# Altium PCB PCB2.PcbDoc (part 2 of 3)
Units mil, origin at the board's own origin, x right, y up, seen from the top; angles counter-clockwise.
Board outline 7000 x 3315 mil, 4 copper layers (Top Signal, GND, PWR, Bottom Signal), stack 23.756 mil thick; 198 components, 124 nets, 690 pads, 273 vias.
Unrouted connection lines stored in the file: 2.
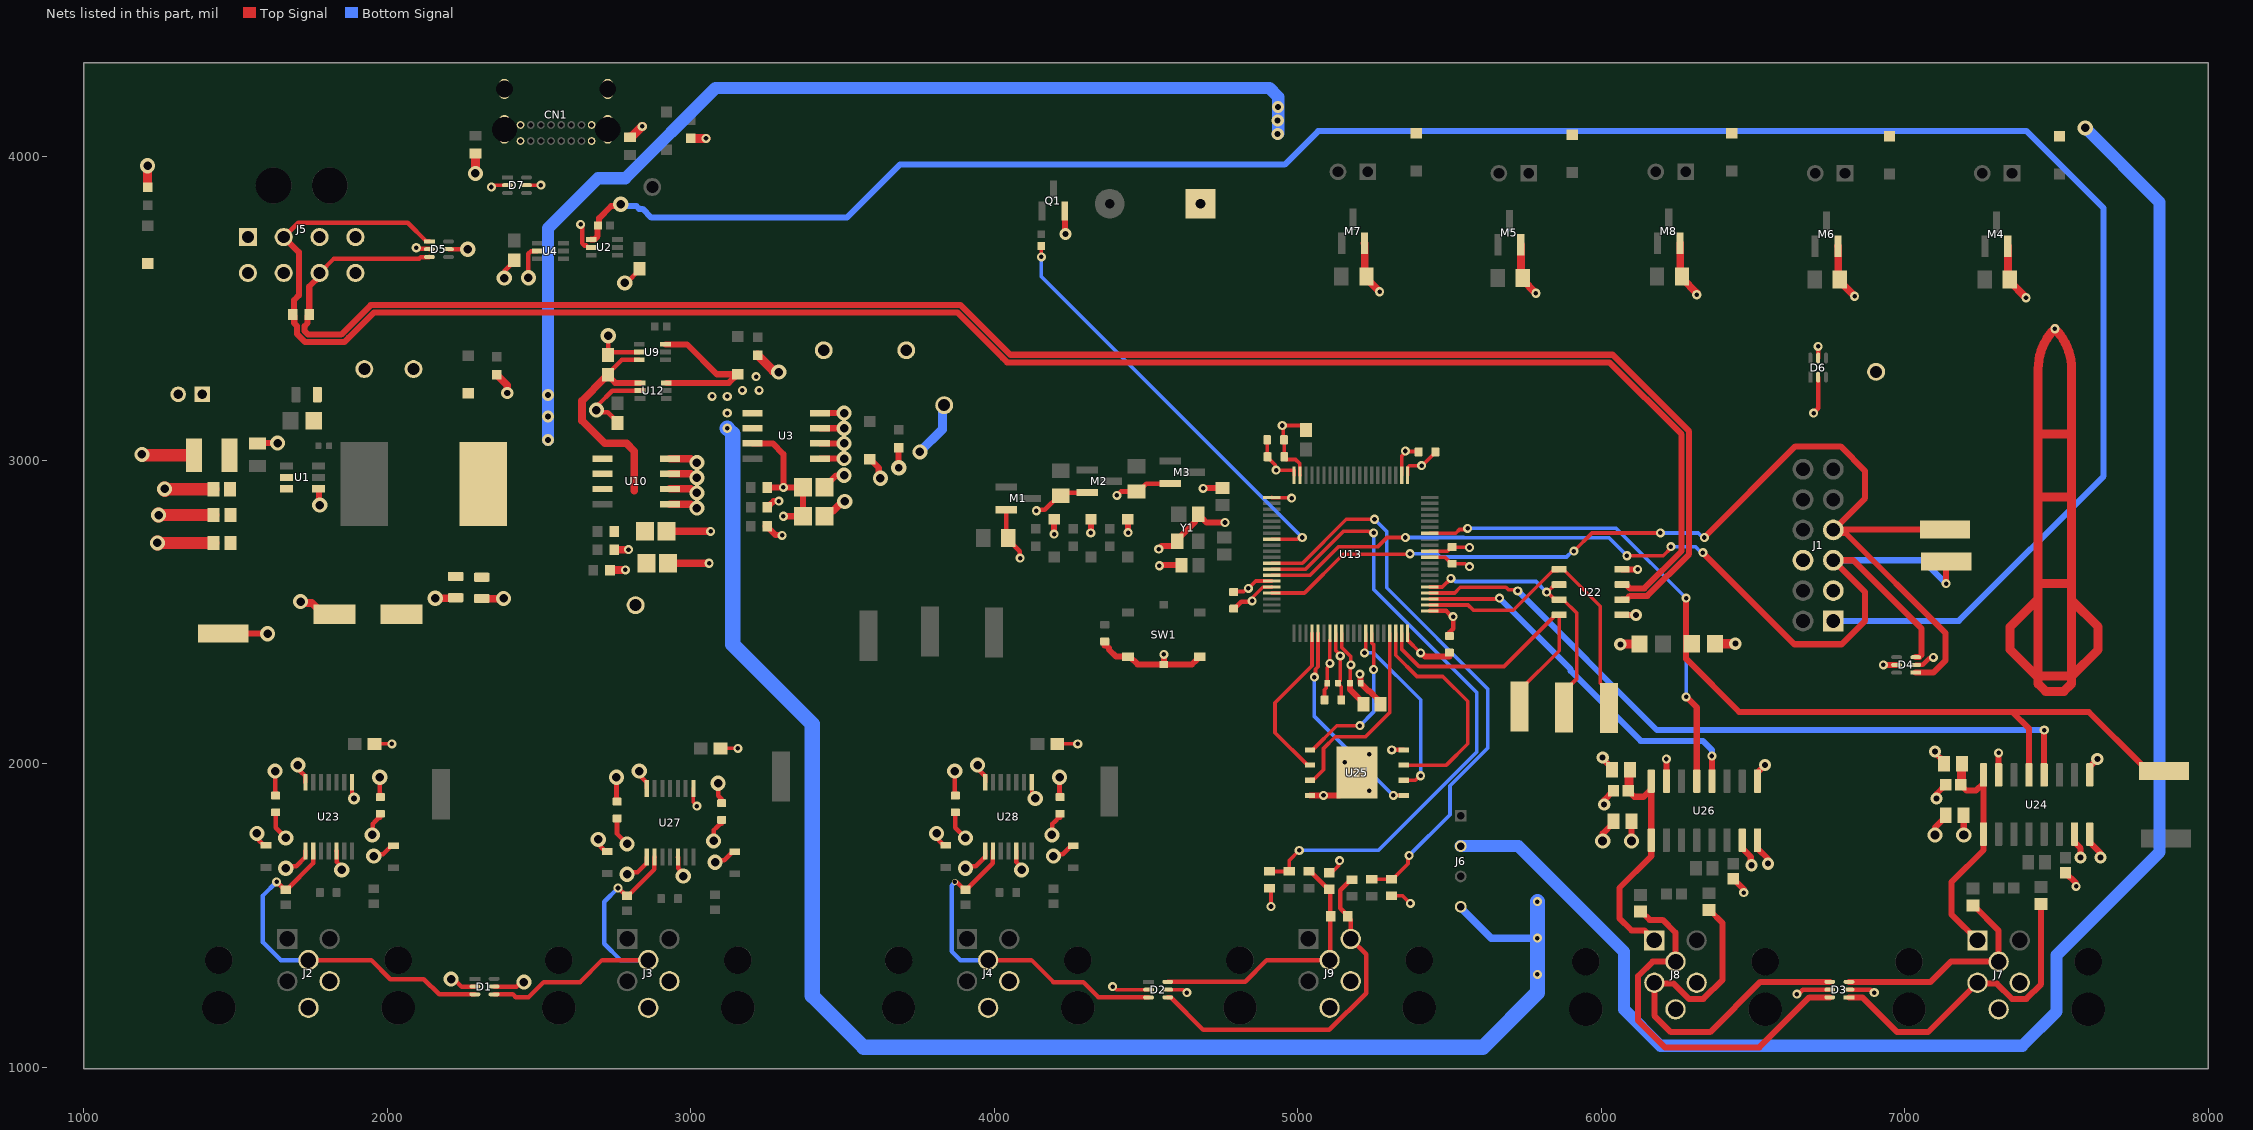
[diagram p4: the nets of this part, all layers, seen from the top]

## Part data (continued)
C28: library part CMP-001-00185-1, "C0603C103K5RACTU - Multilayer Ceramic Capacitors Mlcc - Smd/Smt 50V 0.01Uf X7R 0603 10%", Capacitor Type=Ceramic, Case/Package=0603, Max Operating Temperature=125°C, Min Operating Temperature=-55°C, Tolerance=10%, Voltage Rating=50V, Mounting Technology="Surface Mount", Pins=2, RoHS Compliant=Yes
C32 C34 C49 C51 C54 C56: library part CMP-001-00094-1, "CAP CER 10000PF 50V X7R 0603", Case/Package="0603 (1608 Metric)", Manufacturer="TDK Corporation", Operating Temperature="-55°C ~ 125°C", Temperature Coefficient=X7R, Tolerance=10%, Voltage - Rated=50V, ComponentLink1Description=Datasheet, ComponentLink1URL=https://product.tdk.com/info/en/catalog/spec/mlccspec_automotive_general_en.pdf, Design Item ID=CGA3E2X7R1H103K080AA, Manufacturer Part Number=CGA3E2X7R1H103K080AA, Mounting Type="Surface Mount, MLCC", Size / Dimension="0.063\" L x 0.031\" W (1.60mm x 0.80mm)", Source=PlumBay_SchLib.SchLib, Thickness (Max)="0.035\" (0.90mm)"
C35 C37 C41 C43: library part CMP-001-00007-7, "Chip Capacitor, 1 uF, +/- 10%, 50 V, 0805 (2012 Metric)", Capacitor Type=Ceramic, Case/Package=0805, Max Operating Temperature=125°C, Min Operating Temperature=-55°C, Tolerance=10%, Voltage Rating=50V, Mounting Technology=SM, Pins=2, RoHS Compliant=True
C36 C38 C39 C42 C44 C45: library part CMP-001-00017-7, "Chip Capacitor, 100 nF, +/- 10%, 50 V, 0603 (1608 Metric)", Capacitor Type=Ceramic, Case/Package=0603, Max Operating Temperature=125°C, Min Operating Temperature=-55°C, Tolerance=10%, Voltage Rating=50V, Mounting Technology=SM, Pins=2, RoHS Compliant=True
C40 C46: library part CMP-001-00107-2, "KGM15ACG1H331FT - Cap Ceramic 330pF 50V C0G 1% Pad SMD 0603 125C T/R", Capacitor Type=Ceramic, Case/Package=0603, Max Operating Temperature=125°C, Min Operating Temperature=-55°C, Mounting Technology="Surface Mount", Pins=2, RoHS Compliant=Yes
CN1: library part CMP-002-00138-4, "USB Connector, 16 Contact(s), Female, Right Angle, Solder Terminal, Locking, Receptacle", Max Operating Temperature=85°C, Min Operating Temperature=-40°C, Voltage Rating=20V, Gender=Receptacle, Pins=16
CS1 CS2 CS3 D_Rx D_Tx DE GND MISO MOSI Rx SCK SCL SDA Tx: library part CMP-002-00130-3, "PC TEST POINT 1206 footprint RCWCTE"
D1 D2 D3 D4 D5 D6 D7: library part CMP-004-00069-1, "ESD Suppressors / TVS Diodes 4 Ch TVS Diode Array 3.3V 6.0A 200mW", Case/Package=SOT-363, Max Operating Temperature=150°C, Max Surge Current=5A, Min Operating Temperature=-55°C, Mounting Technology="Surface Mount", Pins=6
DS1 DS2 DS3 DS4 DS5 DS6 DS7: library part CMP-007-00024-2, "LED Uni-Color Red, 62.5 mW, 25 mA, -30 to 85 degC, 2-Pin SMD, RoHS, Tape and Reel", Case/Package=0603, Colour=Red, Forward Current=20mA, Forward Voltage=2V, Manufacturer=Lite-On, Max Operating Temperature=85°C, Min Operating Temperature=-55°C, Package Description="2-Pin Surface Mount Device, Body 1.6 x 0.8 mm", Package Quantity=3000, Package Reference=C191KRKT, Power=75mW, Datasheet URL=http://optoelectronics.liteon.com/upload/download/DS-22-99-0151/S_110_LTST-C190KRKT.pdf, Datasheet Version="Rev. F, 05/2013", Illumination Colour=Red, Lens Style=Diffused, Luminous Intensity=54mcd, Manufacturer URL=http://www.us.liteon.com/, Mounting Technology=SM, Nominal Vf=2V, Packaging=TapeandReel, Pins=2, RoHS Compliant=True, Viewing Angle=130degrees
DS8: library part CMP-007-00013-2, "LED Uni-Color Green, 52 mW, 20 mA, -40 to 85 degC, 2-Pin SMD, RoHS, Tape and Reel", Case/Package=0603, Colour=Green, Forward Current=20mA, Forward Voltage=2.2V, Manufacturer=Avago, Max Operating Temperature=85°C, Min Operating Temperature=-40°C, Package Description="2-Pin Surface Mount Device, Body 1.6 x 0.8 mm, Height 0.9 mm", Package Quantity=4000, Package Reference=HSMX-C190, Power=52mW, Datasheet URL=http://docs.avagotech.com/docs/AV02-0551EN, Datasheet Version=Mar-12, Illumination Colour=Green, Lens Style=Diffused, Luminous Intensity=15mcd, Manufacturer URL=http://www.avagotech.com/, Mounting Technology=SM, Nominal Vf=2.2V, Packaging=TapeandReel, Pins=2, RoHS Compliant=True, Viewing Angle=170degrees
J1: library part CMP-002-00120-1, "Conn Shrouded Header (4 Sides) HDR 12 POS 2.54mm Solder ST Top Entry Thru-Hole C-Grid® Tray", Max Operating Temperature=120°C, Min Operating Temperature=-55°C, Voltage Rating=250V, Connector Type="Male Pin", Gender=Male, Mounting Technology="Through Hole", Pins=12
J2 J3 J4 J7 J8 J9: library part CMP-002-00123-1, "Circular Connector, 5 Contact(s), Brass, Female, Solder Terminal, Socket", Max Operating Temperature=105°C, Min Operating Temperature=-40°C, Pins=5
J5: library part CMP-002-00126-1, "0430450800 Connector Header Through Hole, Right Angle 8 position 0.118\" (3.00mm)"
J6: library part CMP-002-00139-2, "TS-104-G-AA", Max Current Rating=1A, Max Operating Temperature=125°C, Min Operating Temperature=-55°C, Gender=Male, Mounting Technology="Through Hole"
L1: library part CMP-006-00051-2, "SRR1208-220ML Inductor Power Shielded Wirewound 22uH 20% 1KHz 23Q-Factor Ferrite 3.5A 0.043Ohm DCR T/R SRR1208-220ML", Case/Package=5050, Current Rating=3.5A, Max Operating Temperature=125°C, Min Operating Temperature=-40°C, Self Resonant Frequency=7MHz, Tolerance=20%, Max Current Rating=3.5A, Mounting Technology="Surface Mount", Pins=2
LS1: library part CMP-00027-00004-1, "CMI-1210-5-95T 12 mm, 5 Vdc, 98 dB, Through Hole, Magnetic Audio Indicator Buzzer CMI-1210-5-95T"
M1 M2 M3 M4 M5 M6 M7 M8: library part CMP-013-00040-2, "PJA3404_R1_00001 - Power Field-Effect Transistor, 5.6A I(D), 30V, 0.03ohm, 1-Element, N-Channel, Silicon, Metal-oxide Semiconductor FET", Drain Current-Max (ID)=5.6A, Drain-source On Resistance-Max=30mR, DS Breakdown Voltage-Min=30V, Operating Mode="ENHANCEMENT MODE", Package Body Material=Plastic, Package Shape=Rectangular, Package Style="SMALL OUTLINEMeter", Pulsed Drain Current-Max (IDM)=22A, FET Technology="METAL-OXIDE SEMICONDUCTOR", JESD-30 Code=R-PDSO-G3, Number of Elements=1, Pins=3, Polarity/Channel Type=N-CHANNEL, Reach SVHC Compliant=Yes, RoHS Compliant=Yes, Surface Mount=Yes, Terminal Form="Gull Wing", Terminal Position=DUAL, Transistor Application=SWITCHING, Transistor Element Material=SILICON
P1 P2 P3 P4 P5: library part CMP-002-00032-2, "Male Header, Pitch 2.5 mm, 1 x 2 Position, Height 6.1 mm, Tail Length 3.4 mm, -25 to 85 degC, RoHS, Bulk", Manufacturer=JST, Max Operating Temperature=85°C, Min Operating Temperature=-25°C, Package Description="XH Series Disconnectable Crimp Style Connector, Pitch 2.5 mm, 1 x 2 Position, Height 6.1 mm, Tail Length 3.4 mm", Case/Package=S2B-XH-A(LF)(SN), Connector Type=Header, Datasheet URL=http://www.jst-mfg.com/product/pdf/eng/eXH.pdf, Datasheet Version=May-16, Gender=Male, Manufacturer URL=http://www.jst.com/home2.html, Mounting Technology=TH, Package Reference=S2B-XH-A(LF)(SN), RoHS Compliant=Unknown
Q1: library part CMP-013-00047-1, "Transistor, Bipolar, Si, NPN, Amplifier, Small Signal, Vceo 40VDC, IC 200MA, Pd 350MW", Case/Package=SOT-23, Frequency=300MHz, Max Operating Temperature=150°C, Min Operating Temperature=-55°C, Mounting Technology="Surface Mount", Pins=3
R1: library part CMP-009-00024-9, "Chip Resistor, 100 KOhm, +/- 1%, 0.125 W, -55 to 155 degC, 0805 (2012 Metric)", Case/Package=0805, Max Operating Temperature=155°C, Min Operating Temperature=-55°C, Power=125mW, Tolerance=1%, Voltage Rating=150V, Mounting Technology=SM, Pins=2, RoHS Compliant=True
R2 R8: library part CMP-009-00015-9, "Chip Resistor, 10 KOhm, +/- 1%, 0.1 W, -55 to 155 degC, 0402 (1005 Metric)", Case/Package=0402, Max Operating Temperature=155°C, Min Operating Temperature=-55°C, Power=100mW, Tolerance=1%, Voltage Rating=50V, Mounting Technology=SM, Pins=2, RoHS Compliant=True
R3: library part CMP-009-00374-1, "RMCF0805FT8K66 Res Thick Film 0805 8.66K Ohm 1% 1/8W ±100ppm/°C Molded SMD SMD Paper T/R RMCF0805FT8K66", Case/Package=0805, Max Operating Temperature=155°C, Min Operating Temperature=-55°C, Tolerance=1%, Voltage Rating=150V, Mounting Technology="Surface Mount"
R4 R7 R9 R12: library part CMP-009-00360-1, "Res Thick Film 0603 220K Ohm 1% 0.1W(1/10W) ±100ppm/C Pad SMD Automotive T/R", Case/Package=0603, Max Operating Temperature=155°C, Min Operating Temperature=-55°C, Tolerance=1%, Voltage Rating=75V, Mounting Technology="Surface Mount"
R5: library part CMP-009-00221-1, "RQ73C1J45K3BTD - Fixed Resistor, Thin Film, 0.15W, 45300ohm, 75V, 0.1% +/-Tol, 10ppm/Cel, Surface Mount, 0603", Case/Package=0603, Max Operating Temperature=155°C, Min Operating Temperature=-55°C, Power=150mW, Tolerance=0.1%, Voltage Rating=75V, Mounting Technology="Surface Mount", Pins=2, RoHS Compliant=Yes
R6: library part CMP-009-00241-2, "Fixed Resistor, Metal Glaze/thick Film, 0.1W, 75000ohm, 75V, 1% +/-Tol, 100ppm/Cel, Surface Mount, 0603 RMCF0603FT75K0", Case/Package=0603, Max Operating Temperature=155°C, Min Operating Temperature=-55°C, Power=100mW, Tolerance=1%, Mounting Technology="Surface Mount", Pins=2, RoHS Compliant=Yes
R10: library part CMP-009-00239-3, "Fixed Resistor, Metal Glaze/thick Film, 0.1W, 15800ohm, 75V, 1% +/-Tol, 100ppm/Cel, Surface Mount, 0603 RC0603FR-0715K8L", Case/Package=0603, Max Operating Temperature=155°C, Min Operating Temperature=-55°C, Power=100mW, Tolerance=1%, Mounting Technology="Surface Mount", Pins=2, RoHS Compliant=Yes
R11: library part CMP-009-00240-2, "Fixed Resistor, Metal Glaze/thick Film, 0.1W, 47500ohm, 75V, 1% +/-Tol, 100ppm/Cel, Surface Mount, 0603 ERJ-3EKF4752V", Case/Package=0603, Max Operating Temperature=155°C, Min Operating Temperature=-55°C, Power=100mW, Tolerance=1%, Mounting Technology="Surface Mount", Pins=2, RoHS Compliant=Yes
R13: library part CMP-009-00178-1, "Chip Resistor, 240 Ohm, +/- 5%, 100 mW, -55 to 155 degC, 0402 (1005 Metric), RoHS, Tape and Reel", Case Code (Metric)=1005, Case/Package=0402, Manufacturer=Panasonic, Manufacturer Part Number=ERJ-2GEJ241X, Max Operating Temperature=155°C, Min Operating Temperature=-55°C, Package Quantity=10000, Power Rating="100 mW", Tolerance=5%, Voltage Rating=50V, Case\/Package=0402, Component Type=Standard, ComponentLink1Description="Manufacturer URL", ComponentLink1URL=http://www.panasonic.com/, ComponentLink2Description=Datasheet, ComponentLink2URL=http://industrial.panasonic.com/cdbs/www-data/pdf/RDA0000/AOA0000C84.pdf, DatasheetVersion=03/2015, Design Item ID=CMP-2002-00493-3, Height="0.35 mm", Length="1 mm", Mount="Surface Mount", Mounting Technology="Surface Mount", PackageDescription="2-Pin Surface Mount Device, Body 1 x 0.5 mm", PackageReference=0402, Packaging="Tape and Reel", PartNumber=ERJ-2GEJ241x, Pins=2, Radiation Hardening=No, REACH SVHC=Yes, RoHSCompliant=true, Source=PC4-SODIMM_V200_RC_A1_20141015.SCHLIB, Width="0.5 mm"
R14 R15 R20 R23 R24 R25 R26 R27: library part CMP-009-00018-9, "Chip Resistor, 10 KOhm, +/- 1%, 125 mW, -55 to 155 degC, 0805 (2012 Metric)", Case/Package=0805, Max Operating Temperature=155°C, Min Operating Temperature=-55°C, Power=125mW, Tolerance=1%, Voltage Rating=150V, Mounting Technology=SM, Pins=2, RoHS Compliant=True
R16 R18 R21 R49: library part CMP-009-00324-1, "Fixed Resistor, Metal Glaze/thick Film, 0.1W, 2200ohm, 75V, 1% +/-Tol, 100ppm/Cel, Surface Mount, 0603", Pins=2, RoHS Compliant=Yes
R17 R19: library part CMP-009-00032-9, "Chip Resistor, 4.7 KOhm, +/- 1%, 0.125 W, -55 to 155 degC, 0805 (2012 Metric)", Case/Package=0805, Max Operating Temperature=155°C, Min Operating Temperature=-55°C, Power=125mW, Tolerance=1%, Voltage Rating=150V, Mounting Technology=SM, Pins=2, RoHS Compliant=True
R22: library part CMP-009-00231-3, "CRGCQ0603J220R - Fixed Resistor, Metal Glaze/thick Film, 0.1W, 220ohm, 75V, 5% +/-Tol, 100ppm/Cel, Surface Mount, 0603", Case/Package=0603, Max Operating Temperature=155°C, Min Operating Temperature=-55°C, Resistor Type="FIXED RESISTOR", Mounting Technology="Surface Mount", Pins=2, Reach SVHC Compliant=Yes, RoHS Compliant=Yes
R28 R29: library part CMP-009-00261-1, "Fixed Resistor, Metal Glaze/thick Film, 0.1W, 5100ohm, 75V, 1% +/-Tol, 100ppm/Cel, Surface Mount, 0603", Case/Package=0603, Max Operating Temperature=155°C, Min Operating Temperature=-55°C, Power=100mW, Tolerance=1%, Mounting Technology="Surface Mount", Pins=2, RoHS Compliant=Yes
R30 R31 R32: library part CMP-009-00192-1, "0 Ohms Jumper 0.1W, 1/10W Chip Resistor 0603 (1608 Metric) Automotive AEC-Q200 Thick Film", Manufacturer="Stackpole Electronics Inc", Manufacturer Part #=RMCF0603ZT0R00, ComponentLink1Description=Datasheet, ComponentLink1URL=https://industrial.panasonic.com/ww/products/resistors/chip-resistors/general-purpose-chip-resistors/models/ERJ2GE0R00X, ComponentLink2Description="Manufacturer Website", ComponentLink2URL=https://industrial.panasonic.com/ww/products/resistors/chip-resistors/general-purpose-chip-resistors/models/ERJ2GE0R00X, Design Item ID=RT-0R00-F-1/10W-0603, Distributor=Digikey, Distributor Part #=RMCF0603ZT0R00CT-ND, Part Description="0 Ohms Jumper 0.1W, 1/10W Chip Resistor 0603 (1608 Metric) Automotive AEC-Q200 Thick Film", Source=PlumBay_SchLib.SchLib
R33 R34 R45 R46 R47 R48: library part CMP-009-00194-1, "Fixed Resistor, Metal Glaze/thick Film, 0.1W, 100ohm, 75V, 1% +/-Tol, 100ppm/Cel, Surface Mount, 0603", Case/Package=0603, Max Operating Temperature=155°C, Min Operating Temperature=-55°C, Power=100mW, Tolerance=1%, Mounting Technology="Surface Mount", Pins=2, RoHS Compliant=Yes
R35 R36 R43 R44: library part CMP-009-00323-1, "Fixed Resistor, Metal Film, 0.1W, 47ohm, 75V, 0.05% +/-Tol, 10ppm/Cel, Surface Mount, 0603", Case/Package=0603, Max Operating Temperature=155°C, Min Operating Temperature=-55°C, Power=100mW, Tolerance=0.05%, Mounting Technology="Surface Mount", Pins=2, RoHS Compliant=Yes
R37 R38 R39 R40 R41 R42: library part CMP-009-00365-1, "Res Thick Film 0603 220K Ohm 1% 0.1W(1/10W) ±100ppm/C Pad SMD Automotive T/R", Case/Package=0603, Max Operating Temperature=155°C, Min Operating Temperature=-55°C, Tolerance=1%, Voltage Rating=75V, Mounting Technology="Surface Mount"
SW1: library part CMP-00028-00009-2, "Switch Tactile N.O. SPST Round Button Gull Wing 0.05A 12VDC 500000Cycles 1.57N SMD T/R PTS526SMG15SMTR2 LFS"
U1: library part CMP-019-00106-1, "SIMPLE SWITCHER® synchronous buck converter with 4.3V-to-60V, 2.5A and low quiescent current 6-SOT-23-THIN -40 to 150", Pins=6
U2 U4 U9 U12: library part CMP-019-00086-1, "1.5-V to 5.5-V, 1.5-A, 0.5-µA IQ ideal diode with integrated FET 6-SC70 -40 to 105", Pins=6
U3 U10: library part MIC5209YM-TR-2, "IC REG LIN POS ADJ 500MA 8SOIC"
U5 U6 U7 U8 U11 U14 U15 U16 U17 U18 U19 U20 U21: library part CMP-00024-00007-1, "Led Driver, Cc/Linear, -40 To 125Deg C Rohs Compliant: Yes", Case/Package=SOD, Max Operating Temperature=125°C, Max Output current=21mA, Max Supply Voltage=60V, Min Input Voltage=2.5V, Min Operating Temperature=-40°C, Mounting Technology="Surface Mount", Pins=2
U13: library part CMP-020-00028-1, "MCU 32-Bit ARM Cortex-M4 RISC 512kByte Flash 1.71V to 3.6V 80-Pin LQFP Tray"
U22: library part CMP-015-00012-1, "Line Transceiver, 1 Func, 1 Driver, 1 Rcvr, PDSO8", Case/Package=SOP, Max Operating Temperature=125°C, Max Supply Voltage=3.6V, Min Operating Temperature=-40°C, Min Supply Voltage=3V, Nominal Supply Voltage=3.3V, Pins=8, RoHS Compliant=Yes
U23 U27 U28: library part CMP-015-00011-1, "Analog Circuit, 1 Func, PDSO14", Case/Package=TSSOP, Max Operating Temperature=125°C, Max Supply Voltage=3.6V, Min Operating Temperature=-55°C, Min Supply Voltage=3V, Nominal Supply Voltage=3.3V, Pins=14, RoHS Compliant=Yes
U24 U26: library part CMP-014-00002-1, "ADC, Delta-Sigma, 24-Bit, 1 Func, 2 Channel, Serial Access, PDSO16"
U25: library part CMP-019-00067-2, "4G-BIT Serial Nand Flash, 3V"
Y1: library part CMP-003-00039-2, "Crystal 32MHz ±20ppm (Tol) ±50ppm (Stability) 18pF FUND 40Ohm 4-Pin Ultra Mini-CSMD T/R", Case/Package=SMD/SMT, Frequency=32MHz, Load Capacitance=18pF, Max Operating Temperature=70°C, Min Operating Temperature=-20°C, ESR=40, Mounting Technology="Surface Mount", Pins=4

## Via types
v1: diameter 30, hole 15, Top Signal to Bottom Signal, 174 vias
v2: diameter 50, hole 28, Top Signal to Bottom Signal, 63 vias
v3: diameter 40, hole 20, Top Signal to Bottom Signal, 22 vias
v4: diameter 20, hole 15, Top Signal to Bottom Signal, 5 vias
v5: diameter 50, hole 30, Top Signal to Bottom Signal, 4 vias
v6: diameter 200, hole 125, Top Signal to Bottom Signal, 4 vias
v7: diameter 50, hole 25, Top Signal to Bottom Signal, 1 vias

## Nets (pads, with @x,y where several pads share a name; then routed paths per layer and width w, separated by ;. In a path a pad name is that pad's centre, name@x,y a point inside that pad or via, vN(x,y) a via of type N, cw(c..) or ccw(c..) an arc to the next point about the centre after c; other vN are vias at no path point)
+3V3: 3V3.1 C11.1 C12.1 C17.2 C18.2 C19.2 C20.2 C21.2 C22.2 C23.2 C24.2 C28.2 C29.2 C30.1 C31.1 C47.1 C48.1 C52.1 C53.1 D1.5 D2.5 D4.5 D6.5 R5.2 R16.2 R17.1 R18.2 R19.1 R21.2 U3.3 U8.1 U13.1 U13.16 U13.28 U13.29 U13.41 U13.51 U13.62 U13.80 U14.1 U15.1 U16.1 U22.8 U23.5 U23.8 U25.8 U27.5 U27.8 U28.5 U28.8 | length 7432.5
  Top Signal w12: U23.8@1883.54,1938.19 1883.54,1893.62 1890,1887.16 v3(1890,1885) ; R21.2@1957.56,2065 v1(2015,2065) ; U27.8@3008.54,1918.19 3008.54,1872.63 3020,1861.17 v1(3020,1860) ; R18.2@3097.56,2050 v1(3155,2050) ; U28.8@4123.54,1938.19 4123.54,1896.46 v2(4135,1885) ; R16.2@4207.56,2065 v1(4275,2065) ; D2.5@4571.53,1255 4622.84,1255 4632.84,1245 v1(4635,1245) ; C17.2@4899.44,3067 4899.94,3066.5 4899.94,3011.5 C23.2@4900.44,3011 4900.44,3009.04 4925.56,2983.92 4925.56,2970.44 v1(4929,2967) 4987.49,2967 4987.99,2966.5 U13.80@4987.99,2950.5 ; U13.16@4914.5,2581.73 4914,2581.23 4885.04,2581.23 4849.97,2546.16 v1@4849.97,2536.27 ; U13.1@4914.5,2877.01 4915,2876.51 4978.49,2876.51 v1(4980,2875) ; U13.28@5125.79,2429.5 5125.79,2371.38 5140,2357.16 v1(5140,2355) 5140,2273.27 C18.2@5132.72,2265.98 ; C18.2@5137.56,2260.16 ccw(c5132.72,2260.16) C18.2@5132.72,2265 5132.72,2264.02 5143.56,2253.17 C24.2@5143.56,2210 ; U13.29@5145.47,2429.5 5145.47,2382.5 5174.97,2353 v1(5175,2325) ; C29.2@5172.28,2265 5173.64,2266.36 5173.64,2323.64 v1(5175,2325) ; U13.62@5342.32,2950.5 5342.32,3012.45 5355,3025.13 v1(5355,3030) 5356.5,3028.5 5396.94,3028.5 C19.2@5398.44,3027 ; U13.51@5435.5,2699.84 5493.32,2699.84 C20.2@5507.04,2713.56 ; C20.2@5509,2713.56 C20.2@5507.04,2713.56 ; v1(5566,2712) 5565.22,2712.78 5507.82,2712.78 C20.2@5507.04,2713.56 ; v1(4849.93,2536.23) v1@4849.97,2536.27
  Top Signal w15: C31.1@1631.77,1826.65 1631.77,1788.23 v2(1665,1755) ; U23.5@1832.36,1711.81 1832.97,1711.2 1832.97,1675.57 1849.79,1658.75 v2(1849.79,1649.27) ; v2(1975,1955) 1975,1904.13 C30.1@1976.77,1902.35 ; D1.5@2351.53,1265 2425.53,1265 2440.53,1280 v2(2450,1280) ; C48.1@2756.77,1806.65 2756.77,1768.23 v2(2790,1735) ; U27.5@2957.36,1691.81 2957.97,1691.2 2957.97,1655.57 2974.79,1638.75 v2(2974.79,1629.27) ; v2(3090,1935) 3090,1893.68 3101.32,1882.35 C47.1@3101.77,1882.35 ; C53.1@3871.77,1826.65 3871.77,1788.23 v2(3905,1755) ; U28.5@4072.36,1711.81 4072.97,1711.2 4072.97,1675.57 4089.79,1658.75 v2(4089.79,1649.27) ; v2(4215,1955) 4215,1904.13 C52.1@4216.77,1902.35 ; C22.2@4789,2510.44 4790.96,2510.44 4813.88,2533.36 4847.06,2533.36 v1(4849.93,2536.23) ; v1(5310,2045) U25.8@5349.5,2045 ; U13.41@5435.5,2502.99 5488.95,2502.99 5507.94,2484 v1(5512,2484) 5512,2444.68 5500.68,2433.35 C21.2@5500,2433.35 ; D6.5@6715,3336.53 v1(6715,3375)
  Top Signal w20: U3.3@3203.75,3055 3270,3055 3305,3020 v1(3305,2910) ; R5.2@3252.56,2910 v1(3305,2910) ; v1(3305,2815) C12.1@3369.57,2815 C11.1@3369.57,2910 v1(3305,2910) ; U8.1@3590,3002.99 3590.98,3002.99 3619.26,2974.72 3619.26,2945.74 v2(3625,2940) ; v1(4197,2756) 4197.45,2756.45 U14.1@4197.45,2805.04 ; v1(4318,2760) 4318.72,2760.72 U15.1@4318.72,2805.04 ; U16.1@4440,2805.04 4440,2762 v1(4441,2761) ; C29.2@5172.28,2265 5172.44,2264.84 5172.44,2243.94 5217.44,2198.94 C28.2@5217.44,2195 ; U22.8@6068.35,2640 v1(6120,2640) ; v1(6930,2325) D4.5@6973.47,2325
  Top Signal w30: v3(6063,2393) 6063.5,2393.5 6126.11,2393.5 R17.1@6126.61,2394 ; R19.1@6375.39,2395 v3(6442,2395) ; 7432.5,2535.5 7347.5,2450.5 7347.5,2375.5 7435,2288 7440,2288 ; 7440,2413 7440,2593 ; 7440,2448 7440,2288 ; 7440,3085.5 7550,3085.5 ; 7442.5,2878 7547.5,2878 ; 7550,2393 7550,2593 ; 7550,2418 7550,2313 7550,2288 ; 7550,2538 7637.5,2450.5 7637.5,2375.5 7550,2288 ; 7550,2543 7550,2593 ; 7550,2633 7550,2593 ; 7440,2288 7440,2263 7465,2238 7525,2238 7550,2263 7550,2288 ; 7440,2288 7550,2288 ; 7440,2593 7440,2683 7440,2958 7440,3163 7440,3300.3 cw(c7627.78,3300.22) v1(7495,3433) cw(c7362.22,3300.22) 7550,3300.38 7550,3085.5 ; 7440,2593 7550,2593 ; 7550,2593 7550,2708 7550,2963 7550,3085.5
  Bottom Signal w30: v2(3755,3027) 3829.44,3101.44 3829.44,3175.44 3V3.1@3835,3181
+5V: 5V.1 C37.1 C43.1 D3.5 D5.5 D7.5 J6.04 LS1.P U3.1 U3.2 U9.6 U11.1 U12.6 U24.15 U26.15 | length 6143
  Top Signal w12: D7.5@2458.53,3906 v1(2506,3906)
  Top Signal w15: D5.5@2201.53,3695 v2(2265,3695) ; v1(6645,1240) 6649.06,1240 6664.06,1255 D3.5@6753.47,1255
  Top Signal w20: U9.6@2916.31,3381.59 2987.41,3381.59 3086.01,3282.99 U11.1@3155,3282.99 ; U12.6@2919.31,3254.59 3125.61,3254.59 U11.1@3154.02,3282.99 ; C43.1@6099.53,1810 6099.76,1809.76 6099.76,1745.24 v5(6100,1745) ; U26.15@6215,1942.44 v1(6215,2015) ; C37.1@7194.53,1830 7194.76,1829.76 7194.76,1765.24 v5(7195,1765) ; U24.15@7310,1962.44 v1(7310,2035)
  Bottom Signal w25: J6.04@5536,1527 5638,1425 v1@5788.65,1425
  Bottom Signal w50: v1(3120,3105) 3138,3087 3138,2392 3400,2130 3400,1235 3570,1065 5610,1065 5790,1245 v1(5790,1305) v1(5790,1425) v1(5790,1545)
  other v1: 3120,3155 3070,3210 3120,3210 3170,3230 3225,3230 3215,3275
+5V_FSB: 5VFSB.1 C14.1 C15.1 R9.1 R10.2 U9.3 U10.3 U12.1 | length 773.5
  Top Signal w15: R9.1@2727,3281.44 2727,3284.32 2773.09,3330.41 U9.3@2829.69,3330.41
  Top Signal w20: R9.1@2727,3278.57 2750.98,3254.59 U12.1@2832.69,3254.59
  Top Signal w25: R9.1@2727,3281.44 2727,3278.57 2719.58,3271.14 2716.7,3271.14 2641.5,3195.94 2641.5,3129.5 2716,3055 2788,3055 2814,3029 2814,2899
+5V_Prgm: J1.1 R2.2 U2.1 | length 7277.8
  Top Signal w20: U2.1@2671.69,3726.59 2681.54,3726.59 2692.95,3738 2692.95,3771.63 R2.2@2694.31,3773 2697.54,3776.23 2697.54,3797.54 2736.88,3836.88 2762.88,3836.88 v2(2769,3843)
  Bottom Signal w20: v2(2769,3843) 2775,3837 2821,3837 2830,3828 2841,3828 2870,3799 3514,3799 3689,3974 4957,3974 5067,4084 7402,4084 7656,3830 7656,2947 7179,2470 J1.1@6765,2470
+10V: 10V.1 C7.2 C8.2 C9.2 C10.2 J6.02 L1.2 R1.2 U7.1 U10.1 U10.2 U17.1 U18.1 U19.1 U20.1 U21.1 | length 9099.3
  Top Signal w40: 10V.1@1923,3299 cw(c1924,3299) 10V.1@1924,3300
  Bottom Signal w40: v3(2529,3066) v3(2529,3144) v3(2529,3215) 2529,3764 2694,3929 2784,3929 3081,4226 4907,4226 4936,4197 4936,4077 v3(4934,4075) ; J6.02@5537,1728 5727,1728 6075,1380 6075,1190 6195,1070 7388,1070 7501,1183 7501,1369 7840,1708 ; v2(7595,4095) 7840,3850 7840,1708 ; 7840,1826 7840,1708
  other v3: 4934,4119 4935,4164
+48V: C2.1 C3.2 C4.2 C5.2 C6.2 J5.1 J5.5 J5.6 U1.2 U1.3 U5.1
Anemom_AN+: R38.1 R39.2 U13.12 | length 1937.9
  Top Signal w12: U13.12@4914.5,2660.47 5015.47,2660.47 5160,2805 v1(5253,2805) ; R38.1@5243.9,1618.42 5244.49,1619 5308.51,1619 R39.2@5309.1,1619.58 5313.6,1619.58 5363.56,1669.54 5363.56,1693.56 v1(5367,1697)
  Bottom Signal w12: v1(5253,2805) 5293,2765 5293,2579 5626,2246 5626,2051.37 5501.61,1926.98 5501.61,1831.61 v1(5367,1697)
Anemom_AN-: R41.1 R42.2 U13.13 | length 2119.2
  Top Signal w12: R42.2@4907.1,1644.58 4907.18,1644.5 4971.82,1644.5 R41.1@4971.9,1644.42 4971.9,1680.9 v1(5005,1714) ; U13.13@4914.5,2640.79 5025.79,2640.79 5150,2765 5233.97,2765 5235.53,2763.44 5246.56,2763.44 v1(5250,2760)
  Bottom Signal w12: v1(5005,1714) 5266,1714 5590,2038 5590,2234 5250,2574 v1(5250,2760)
Anemom_Con_AN+: D2.4 J9.2 R31.2 R37.2 | length 1177.2
  Top Signal w15: D2.4@4571.53,1229.41 4580.99,1229.41 4688.02,1122.38 5104.46,1122.38 5225.56,1243.49 5225.56,1371.11 J9.2@5174.6,1422.08 ; J9.2@5174.8,1422.28 J9.2@5174.6,1422.08 ; R37.2@5179.1,1617.58 5174.6,1617.58 5140,1582.99 5140,1523.53 5164.56,1498.97 R31.2@5164.56,1497 5164.56,1495.03 5174.6,1484.99 J9.2@5174.6,1422.08
Anemom_Con_AN-: D2.6 J9.5 R31.1 R32.2 R40.2 | length 891.7
  Top Signal w15: D2.6@4571.53,1280.59 4826.61,1280.59 4898.5,1352.48 J9.5@5105,1352.48 5107.22,1354.7 5107.22,1494.78 R31.1@5109.44,1497 5106.72,1499.72 5106.72,1582.72 R32.2@5104,1585.44 5095.75,1593.69 5092.49,1593.69 5041.6,1644.58 R40.2@5037.1,1644.58
Bias_TC1: D1.3 J2.5 R33.2 U23.2 | length 1192.2
  Top Signal w15: v1(1635,1610) 1636.02,1610 1662.05,1583.98 R33.2@1665,1583.98 ; R33.2@1667.95,1583.98 1754.98,1671 1754.98,1711.2 U23.2@1755.59,1711.81 ; J2.5@1740,1352.48 1946.5,1352.48 2009.27,1289.7 2120.3,1289.7 2170.59,1239.41 D1.3@2288.47,1239.41
  Bottom Signal w15: v1(1635,1610) 1590,1565 1590,1410.8 1648.32,1352.48 J2.5@1740,1352.48
Bias_TC2: D1.4 J3.5 R45.2 U27.2 | length 1137.7
  Top Signal w15: D1.4@2351.53,1239.41 2413.82,1239.41 2423.23,1230 2465.1,1230 2515.1,1280 2635,1280 2707.48,1352.48 J3.5@2859.86,1352.48 ; v1(2760,1590) 2761.02,1590 2787.05,1563.98 R45.2@2790,1563.98 ; R45.2@2792.95,1563.98 2879.98,1651 2879.98,1691.2 U27.2@2880.59,1691.81
  Bottom Signal w15: v1(2760,1590) 2715,1545 2715,1405.66 2768.18,1352.48 J3.5@2859.86,1352.48
Bias_TC3: D2.3 J4.5 R47.2 U28.2 | length 1155.3
  Top Signal w15: v4(3870,1610) 3870.96,1609.04 3876.98,1609.04 3902.05,1583.98 R47.2@3905,1583.98 ; R47.2@3907.95,1583.98 3994.98,1671 3994.98,1711.2 U28.2@3995.59,1711.81 ; J4.5@3979.72,1352.48 4122.52,1352.48 4195,1280 4292.7,1280 4343.29,1229.41 D2.3@4508.47,1229.41
  Bottom Signal w15: v4(3870,1610) 3870,1608.65 3859.16,1597.81 3859.16,1381.37 3888.05,1352.48 J4.5@3979.72,1352.48
Buzzer_PWM: R13.1 U13.8 | length 1419.4
  Top Signal w12: v1(4155,3670) R13.1@4155,3705.32 ; U13.8@4914.5,2739.21 4998.97,2739.21 5001.31,2741.56 5011.56,2741.56 v1(5015,2745)
  Bottom Signal w12: v1(4155,3670) 4155,3605 v1(5015,2745)
Debug_UART_Rx: D4.1 D_Rx.1 J1.7 U13.17 | length 3531.3
  Top Signal w12: U13.17@4914.5,2562.05 5022.05,2562.05 5150,2690 5368.53,2690 v1(5370,2691.47) ; v1(5910,2700) 5970,2760 v1(6195,2760)
  Top Signal w20: v1(6340,2745) 6640,3045 6789,3045 6870,2964 6870,2875 J1.7@6766,2771 ; D4.1@7036.53,2299.41 7094.41,2299.41 7135,2340 7135,2430 6805.13,2759.87 6775.13,2759.87 J1.7@6765,2770 J1.7@6766,2771 ; D_Rx.1@7133,2772 7132,2771 J1.7@6766,2771
  Bottom Signal w12: v1(5370,2691.47) 5459.39,2691.47 5469.95,2680.92 5886.05,2680.92 5905.13,2700 v1(5910,2700) ; v1(6195,2760) 6320.13,2760 6335.13,2745 v1(6340,2745)
Debug_UART_Tx: D4.3 D_Tx.1 J1.5 U13.14 | length 3424.6
  Top Signal w12: U13.14@4914.5,2621.1 5041.1,2621.1 5134,2714 5262.84,2714 5293.84,2745 v1(5355,2745) ; v1(6085,2685) 6204.85,2685 6230,2710.15 v1(6230,2715)
  Top Signal w20: v1(6335,2695) 6636.79,2393.21 6792.21,2393.21 6870,2471 6870,2565 J1.5@6765,2670 6830,2670 7055.8,2444.2 7055.8,2358.16 7048.77,2351.13 7048.2,2350.59 D4.3@7036.53,2350.59 ; v1(7137,2593) D_Tx.1@7137,2666
  Bottom Signal w12: v1(5355,2745) 5546.16,2745 5547.16,2744 6026,2744 v1(6085,2685) ; v1(6230,2715) 6310.13,2715 6330.13,2695 v1(6335,2695)
  Bottom Signal w20: J1.5@6765,2670 7060,2670 v1(7137,2593)
Flash_QuadSPI_CLK: U13.33 U25.6 | length 627.2
  Top Signal w12: v1(5220,2365) 5220,2367.16 5224.21,2371.38 U13.33@5224.21,2429.5 ; U25.6@5349.5,1945 5387.84,1945 5402.84,1960 v1(5405,1960)
  Bottom Signal w12: v1(5220,2365) 5250,2365 5405,2210 v1(5405,1960)
Flash_QuadSPI_IO0: U13.25 U25.5 | length 681.6
  Top Signal w12: v1(5055,2285) 5058.44,2288.44 5058.44,2310.82 5066.73,2319.1 U13.25@5066.73,2429.5 ; v1(5315,1895) U25.5@5349.5,1895
  Bottom Signal w12: v1(5055,2285) 5055,2155 v1(5315,1895)
Flash_QuadSPI_IO1: U13.24 U25.2 | length 537.9
  Top Signal w12: U25.2@5040.5,1995 5032,1995 4925,2102 4925,2200 5047.05,2322.05 U13.24@5047.05,2429.5
Flash_QuadSPI_IO2: U13.37 U25.3 | length 657.4
  Top Signal w12: U25.3@5040.5,1945 5043,1947.5 5052.5,1947.5 5085,1980 5085,2050 5123.69,2088.69 5223.7,2088.69 5302.95,2167.94 U13.37@5302.95,2429.5
Flash_QuadSPI_IO3: U13.38 U25.7 | length 752.1
  Top Signal w12: U13.38@5322.64,2429.5 5322.64,2357.36 5392.88,2287.12 5477.88,2287.12 5560,2205 5560,2065 5490,1995 U25.7@5349.5,1995
Flash_QuadSPI_NCS: U13.34 U25.1 | length 524.1
  Top Signal w12: U25.1@5040.5,2045 5049,2045 5129,2125 v1(5205,2125) ; U13.34@5243.9,2429.5 5244.4,2429 5244.4,2397.37 5251,2390.77 5251,2311 v1(5250,2310)
  Bottom Signal w12: v1(5205,2125) 5250,2170 v1(5250,2310)
FSB_RS485_RxTx_N: D5.1 J5.2 R30.1 U22.7 | length 6297.8
  Top Signal w15: J5.2@1658.43,3734.92 1705.85,3782.34 2067.26,3782.34 2129.01,3720.59 D5.1@2138.47,3720.59
  Top Signal w20: J5.2@1658.43,3734.92 1708.35,3685 1708.35,3543.23 1692.83,3527.72 1692.83,3485.39 R30.1@1687.44,3480 1693.19,3474.25 1693.19,3451.18 1702.5,3441.87 1702.5,3414.94 1728.86,3388.58 1857.94,3388.58 1872.58,3403.23 1955.36,3486 3879,3486 4028.03,3336.97 4042.68,3322.32 6027.32,3322.32 6265,3084.64 6265,2700.5 6142,2577.5 6094.63,2577.5 6082.13,2590 U22.7@6068.35,2590
FSB_RS485_RxTx_P: D5.3 J5.7 R30.2 U22.6 | length 6068.9
  Top Signal w15: R30.2@1734.31,3471.75 1736.81,3474.25 R30.2@1742.56,3480 ; J5.7@1776.54,3616.81 1823.96,3664.23 2105.19,3664.23 2109.41,3668.45 2137.51,3668.45 D5.3@2138.47,3669.41
  Top Signal w20: R30.2@1736.81,3474.25 1736.81,3451.18 1727.5,3441.87 1727.5,3425.3 1739.22,3413.58 1847.58,3413.58 1945,3511 3889.36,3511 4053.03,3347.32 6037.68,3347.32 6290,3095 6290,2690.15 6152.35,2552.5 6094.63,2552.5 6082.13,2540 U22.6@6068.35,2540 ; R30.2@1742.56,3480 1742.56,3572.05 1776.54,3606.03 J5.7@1776.54,3616.81 J5.7@1775.79,3616.06
FSB_UART_DE: DE.1 U13.45 U22.2 U22.3 | length 923.5
  Top Signal w12: U13.45@5435.5,2581.73 5476.73,2581.73 v1(5505,2610) ; U22.2@5861.65,2590 5847.87,2590 5824.4,2566.53 5821.53,2566.53 v1(5820,2565) 5821.53,2563.47 5824.4,2563.47 5847.87,2540 U22.3@5861.65,2540 5875.43,2540 5920,2495.43 5920,2280.15 5878,2238.15 DE.1@5878,2185
  Bottom Signal w12: v1(5505,2610) 5509.87,2610 5519.87,2600 5785,2600 v1(5820,2565)
FSB_UART_Rx: Rx.1 U13.42 U22.1 | length 1022.5
  Top Signal w12: U13.42@5435.5,2522.68 5561.33,2522.68 5579.01,2505 5710,2505 5840.17,2635.17 5856.83,2635.17 U22.1@5861.65,2640 5875.43,2640 5997,2518.43 5997,2265.15 6026,2236.15 Rx.1@6026,2183
FSB_UART_Tx: Tx.1 U13.39 U22.4 | length 1022.8
  Top Signal w12: U13.39@5342.32,2429.5 5342.32,2377.68 5400,2320 5680,2320 5843.05,2483.05 5843.05,2485.17 5847.87,2490 U22.4@5861.65,2490 5861.65,2371.8 5731,2241.15 Tx.1@5731,2188
GND: C2.2 C3.1 C4.1 C5.1 C6.1 C8.1 C9.1 C10.1 C11.2 C12.2 C13.1 C14.2 C15.2 C16.1 C17.1 C18.1 C19.1 C20.1 C21.1 C22.1 C23.1 C24.1 C25.1 C26.1 C27.1 C28.1 C29.1 C30.2 C31.2 C32.1 C34.1 C35.2 C36.1 C37.2 C38.1 C41.2 C42.1 C43.2 C44.1 C47.2 C48.2 C49.1 C51.1 C52.2 C53.2 C54.1 C56.1 CN1.1 CN1.2 CN1.3 CN1.4 CN1.A1 CN1.A12 CN1.B1 CN1.B12 D1.2 D2.2 D3.2 D4.2 D5.2 D6.2 D7.2 DS1.2 DS2.2 DS3.2 DS4.2 DS5.2 GND.1 J1.3 J1.6 J2.3 J2.S1 J3.3 J3.S1 J4.3 J4.S1 J5.3 J5.4 J5.8 J7.3 J7.S1 J8.3 J8.S1 J9.3 J9.S1 M1.2 M2.2 M3.2 M4.2 M5.2 M6.2 M7.2 M8.2 Q1.2 R3.2 R4.2 R6.1 R7.2 R9.2 R11.1 R12.2 R14.2 R15.2 R20.2 R23.2 R24.2 R25.2 R26.2 R27.2 R28.1 R29.2 R32.1 R39.1 R42.1 R49.2 SW1.3 SW1.4 SW1.G2 U1.4 U2.2 U3.5 U3.6 U3.7 U3.8 U4.2 U9.2 U10.5 U10.6 U10.7 U10.8 U12.2 U13.15 U13.27 U13.40 U13.50 U13.61 U13.79 U22.5 U23.1 U23.14 U24.7 U24.8 U24.9 U25.4 U25.9 U26.7 U26.8 U26.9 U27.1 U27.14 U28.1 U28.14 Y1.2 Y1.4 | length 11014.4
  Top Signal w12: v1(2343,3900) 2347.87,3900 2353.87,3906 D7.2@2395.47,3906 ; v1(4390,1265) 4392.16,1265 4402.16,1255 D2.2@4508.47,1255 ; C22.1@4789,2565.56 4790.3,2566.86 4821.96,2566.86 4832.61,2577.51 v1(4837.48,2577.51) 4861.39,2601.42 U13.15@4914.5,2601.42 ; R42.1@4907.1,1589.58 4912,1584.68 v1(4912,1529) ; U13.79@5007.68,2950.5 5007.18,2951 5007.18,2987.82 4992.96,3002.04 4962.56,3002.04 4955.56,3009.04 C23.1@4955.56,3011 4955.06,3011.5 4955.06,3066.5 C17.1@4954.56,3067 4951.78,3069.78 4951.78,3111.22 v1(4949,3114) 5013.08,3114 5027,3100.08 R49.2@5027,3099.56 ; C24.1@5088.44,2210 5088.44,2242.96 5093.44,2247.96 5093.44,2261.16 C18.1@5097.28,2265 ; C18.1@5097.15,2265.13 5097.15,2316.28 5106,2325.13 v1(5106,2330) ; R32.1@5104,1634.56 5105.97,1634.56 5134.56,1663.15 5134.56,1670.56 v1@5138,1674 ; v1(5106,2330) U13.27@5105.97,2406.5 ; R39.1@5309.1,1564.58 5345.42,1564.58 v1(5371,1539) ; U13.40@5362.01,2429.5 5362.01,2407 v1@5404.01,2365 ; U13.61@5362.01,2950.5 5362.01,2974.97 5369.04,2982 5410.52,2982 5453.56,3025.04 C19.1@5453.56,3027 ; U13.50@5435.5,2680.16 5485.32,2680.16 5507.04,2658.44 C20.1@5509,2658.44 5551.69,2658.44 5561.13,2649 v1(5566,2649)
  Top Signal w15: v2(1570,1770) 1576.7,1763.3 1576.7,1747.28 1593.5,1730.48 C32.1@1600,1730.48 ; v2(1630,1975) 1630,1909.13 C31.2@1631.77,1907.35 ; v2(1665,1655) 1671.7,1661.7 1699.33,1661.7 1730,1692.36 U23.1@1730,1711.81 ; v2(1705,1995) 1711.7,1988.3 1711.7,1975.94 1730,1957.64 U23.14@1730,1938.19 ; v2(1950,1765) 1951.19,1766.19 1951.19,1800.99 1960.53,1810.32 1971.85,1821.65 C30.2@1976.77,1821.65 ; v2(1955,1695) 1961.7,1701.7 1985.51,1701.7 2013.5,1729.69 C34.1@2020,1729.69 ; v1(2095,3700) 2099.06,3700 2103.1,3695.96 2137.51,3695.96 D5.2@2138.47,3695 ; v2(2210,1290) 2219.47,1290 2244.47,1265 D1.2@2288.47,1265 ; v2(2385,3600) 2385,3622.57 2418,3655.57 R4.2@2418,3658.44 ; v2(2465,3601) 2464.48,3601.52 2464.48,3679.84 2473.26,3688.63 2493.32,3688.63 U4.2@2493.69,3689 ; v1(2637,3777) 2637,3772.94 2642.48,3767.46 2642.48,3713.95 2649.21,3707.22 2655.63,3707.22 2661.48,3701.37 2671.32,3701.37 U2.2@2671.69,3701 ; v2(2695,1750) 2701.7,1743.3 2701.7,1727.28 2718.5,1710.48 C49.1@2725,1710.48 ; R9.2@2727,3346.56 R9.2@2727.5,3347.06 ; v2(2728,3410) 2727.5,3409.5 R9.2@2727.5,3347.06 ; v2(2755,1955) 2755,1889.13 C48.2@2756.77,1887.35 ; R12.2@2759,3122.44 2759,3125.32 2726.01,3158.3 2695.7,3158.3 v2(2689,3165) 2695.7,3171.7 2695.7,3183.24 2741.46,3229 U12.2@2832.69,3229 ; v2(2782,3584) 2782.96,3584.96 2788.39,3584.96 2831,3627.57 R7.2@2831,3630.44 ; v2(2790,1635) 2796.7,1641.7 2824.33,1641.7 2855,1672.36 U27.1@2855,1691.81 ; U9.2@2829.69,3356 2736.44,3356 R9.2@2727.5,3347.06 ; v2(2830,1975) 2836.7,1968.3 2836.7,1955.94 2855,1937.64 U27.14@2855,1918.19 ; v2(3075,1745) 3076.19,1746.19 3076.19,1780.99 3085.53,1790.32 3096.85,1801.65 C47.2@3101.77,1801.65 ; v2(3080,1675) 3086.7,1681.7 3110.51,1681.7 3138.5,1709.69 C51.1@3145,1709.69 ; v2(3810,1770) 3816.7,1763.3 3816.7,1747.28 3833.5,1730.48 C54.1@3840,1730.48 ; v2(3870,1975) 3870,1909.13 C53.2@3871.77,1907.35 ; v2(3905,1655) 3911.7,1661.7 3939.33,1661.7 3970,1692.36 U28.1@3970,1711.81 ; v2(3945,1995) 3951.7,1988.3 3951.7,1975.94 3970,1957.64 U28.14@3970,1938.19 ; M1.2@4039.63,2836.6 4039.63,2749.71 R14.2@4046.34,2743 4046.34,2737.09 4084.04,2699.39 4084.04,2677.96 v1(4085,2677) ; v1(4139,2833) 4141.87,2835.87 4166.3,2835.87 R15.2@4213.09,2882.66 ; v2(4190,1765) 4191.19,1766.19 4191.19,1800.99 4200.53,1810.32 4211.85,1821.65 C52.2@4216.77,1821.65 ; v2(4195,1695) 4201.7,1701.7 4225.51,1701.7 4253.5,1729.69 C56.1@4260,1729.69 ; R15.2@4219,2882.66 R15.2@4213.09,2882.66 ; M2.2@4307,2893 4223.43,2893 R15.2@4213.09,2882.66 ; v1(4404,2884) 4404.31,2884 4416.97,2896.66 R20.2@4469,2896.66 4474.91,2896.66 4500.84,2922.6 M3.2@4580.63,2922.6 ; v1(6700,3155) 6700,3156.29 6715,3171.29 D6.2@6715,3273.47 ; D3.2@6816.53,1255 6888.65,1255 6898.65,1245 v1(6900,1245) ; D4.2@7036.53,2325 7037.49,2325.96 7059.61,2325.96 7080.78,2347.13 7092.13,2347.13 v1(7095,2350)
  Top Signal w20: GND.1@1459,2428 v2(1605,2428) ; R3.2@1572,3055.4 1572.3,3055.7 1637.7,3055.7 v2(1638,3056) ; U1.4@1773.3,2905.6 1775.15,2903.79 1775.15,2853.85 v2(1777,2852) ; C13.1@3246.81,2782 3250.59,2782 3278.68,2753.91 3299.09,2753.91 v1(3301,2752) ; R6.1@3252.56,2845 3252.56,2846.97 3258.31,2852.72 3260.28,2852.72 3272.56,2865 v1(3290,2865) ; U3.5@3426.25,3005 v2(3505,3005) ; U3.6@3426.25,3055 v2(3505,3055) ; U3.7@3426.25,3105 v2(3505,3105) ; U3.8@3426.25,3155 v2(3505,3155) ; C11.2@3440.43,2910 3440.43,2910.98 3479.45,2950 v2(3505,2950) ; v7(3685,2975) DS4.2@3685,3040.47 ; Q1.2@4232.75,3821 4232.75,3747.25 v3(4235,3745) ; C26.1@4364,2389.65 4368.92,2389.65 4377.74,2380.82 4377.74,2375.9 4401.48,2352.17 SW1.3@4440.89,2352.17 4446.8,2352.17 4472.39,2326.57 SW1.G2@4559,2326.57 v1(4559,2360) ; v1(4542,2707) 4552,2717 4592,2717 4602.5,2727.5 Y1.2@4602.5,2732 4602.5,2737 4661,2795.5 4661,2811.5 Y1.4@4671.5,2822 4671.5,2817 4682,2806.5 4687,2806.5 4699.15,2794.35 v1(4760.29,2794.35) ; v1(4544,2652) 4546,2654 C27.1@4617.44,2654 ; SW1.G2@4560.97,2326.57 4651.52,2326.57 4667.43,2342.48 4667.43,2348.39 4671.2,2352.17 SW1.4@4677.11,2352.17 ; v1(4688,2907) 4688.56,2907.56 C25.1@4752,2907.56 ; U25.4@5040.5,1895 5137,1895 5195,1953 U25.9@5195,1970 ; v1(5155,2005) 5190,1970 U25.9@5195,1970 ; U25.9@5200,1945 v1(5235,1910) ; v1(5205,2295) 5207.56,2292.44 5207.56,2265.16 C29.1@5207.72,2265 5207.72,2264.33 5233.48,2238.56 5236.98,2238.56 5262.87,2212.67 5262.87,2204.68 C28.1@5272.56,2195 ; v1(5235,2030) 5195,1990 U25.9@5195,1970 ; v1(5405,2365) 5407.71,2365 5420.06,2352.65 C21.1@5500,2352.65 ; v5(6005,1745) 6005,1768.62 6040.47,1804.09 C43.2@6040.47,1810 ; v3(6005,2020) 6005,2016.38 6035.47,1985.91 C41.2@6035.47,1980 ; v3(6010,1865) 6010,1879.61 C42.1@6040.39,1910 ; U22.5@6068.35,2490 v3(6115,2490) ; C44.1@6435,1620.39 6470,1585.39 v1(6470,1575) ; U26.7@6465,1747.56 6466.81,1745.75 6466.81,1718.78 6492.98,1692.61 6492.98,1667.02 v3(6495,1665) ; U26.8@6515,1747.56 6515,1720.59 6550,1685.59 v3(6550,1670) ; U26.9@6515,1942.44 6515,1969.41 6540,1994.41 v3(6540,1995) ; v5(7100,1765) 7100,1788.62 7135.47,1824.09 C37.2@7135.47,1830 ; v3(7100,2040) 7100,2036.38 7130.47,2005.91 C35.2@7130.47,2000 ; v3(7105,1885) 7105,1899.61 C36.1@7135.39,1930 ; C38.1@7530,1640.39 7565,1605.39 v1(7565,1595) ; U24.7@7560,1767.56 7560,1740.59 7580,1720.59 v3(7580,1690) ; U24.8@7610,1767.56 7610,1740.59 7645,1705.59 v3(7645,1690) ; U24.9@7610,1962.44 7610,1989.41 7635,2014.41 v3(7635,2015)
  Top Signal w25: v2(1714,2534) 1718.78,2529.22 1751.15,2529.22 1788.36,2492 C10.1@1825.76,2492 ; v2(2158,2545) 2223.43,2545 ccw(c2223.43,2546.57) C8.1@2225,2546.57 ; C9.1@2311,2543.57 2383,2543.57 v2(2383,2544) ; DS3.2@2360,3281.47 2395,3246.47 v3(2395,3221) ; C16.1@2735.53,2637.97 v1(2784.39,2637.97) ; R11.1@2747.56,2705 v1(2794.67,2705) ; C14.2@2915,2765 v1(3065,2765) ; C15.2@2920,2660 v1(3060,2660) ; U10.5@2931.25,2855 3000.24,2855 3013.24,2842 v2(3020,2842) ; U10.6@2931.25,2905 3000.24,2905 3013.24,2892 v2(3020,2892) ; U10.7@2931.25,2955 3000.24,2955 3013.24,2942 v2(3020,2942) ; U10.8@2931.25,3005 3000.24,3005 3013.24,2992 v2(3020,2992) ; C12.2@3440.43,2815 3440.43,2815.98 3457.46,2833.01 3469.25,2833.01 3500.24,2864 v2(3507,2864) ; M7.2@5220,3715 5220.69,3714.31 5220.69,3610.85 R26.2@5226.54,3605 5226.54,3599.09 5270,3555.63 v1(5270,3555) ; M5.2@5735,3710 5735.69,3709.31 5735.69,3605.85 R24.2@5741.54,3600 5741.54,3594.09 5785,3550.63 v1(5785,3550) ; M8.2@6260,3715 6260.69,3714.31 6260.69,3610.85 R27.2@6266.54,3605 6266.54,3599.09 6315,3550.63 v1(6315,3545) ; M6.2@6780,3705 6780.69,3704.31 6780.69,3600.85 R25.2@6786.54,3595 6786.54,3589.09 6835,3540.63 v1(6835,3540) ; M4.2@7340,3705 7340.69,3704.31 7340.69,3600.85 R23.2@7346.54,3595 7346.54,3589.09 7400,3535.63 v1(7400,3535)
  Top Signal w30: DS1.2@1210,3899.53 v2(1210,3970) ; v2(2290,3945) R29.2@2290,4010.47 ; R28.1@2800,4064.53 2803.94,4064.53 2839.41,4100 v1(2840,4100) ; DS2.2@3000,4060.47 3049.53,4060.47 v1(3050,4060) ; DS5.2@3220,3345.47 3271.65,3293.83 3286.17,3293.83 v2(3290,3290)
  Top Signal w40: v2(1191,3019) 1194,3016 C3.1@1362.5,3016 ; v2(1242,2727) C5.1@1427.44,2727 ; v2(1246,2819) C4.1@1427.44,2819 ; v2@1267,2904 C6.1@1426.44,2904
  Top Signal w50: v2(1266,2905) v2@1267,2904
  other v1: 5138,1680 5085,1895 5408,2982
LC1_Con_AN+: D3.1 J7.4 R35.1 | length 1055.2
  Top Signal w20: D3.1@6816.53,1229.41 6860.59,1229.41 6975.12,1114.88 7077.13,1114.88 J7.4@7240.13,1277.88 7243.3,1274.71 7303.59,1274.71 7353.88,1224.42 7401.47,1224.42 7450,1272.95 R35.1@7450,1537.44
LC1_Con_AN-: D3.3 J7.5 R36.1 | length 742.1
  Top Signal w20: D3.3@6816.53,1280.59 7085.59,1280.59 7152.48,1347.48 J7.5@7309.72,1347.48 7309.72,1449.68 7226.97,1532.44 R36.1@7225,1532.44
LC1_Con_VDD: C35.1 C36.2 J7.1 U24.1 U24.16 | length 789.9
  Top Signal w20: C36.2@7187.07,1932.46 C36.2@7184.61,1930 7204.02,1910.59 7235.11,1910.59 U24.16@7260,1935.47 ; C35.1@7187.07,1997.54 C35.1@7189.53,2000 ; J7.1@7240.13,1417.08 7155,1502.2 7155,1610 7260,1715 U24.1@7260,1767.56 U24.16@7260,1962.44
  Top Signal w30: C36.2@7187.07,1932.46 C35.1@7187.07,1997.54
LC1_DRDY: U13.44 U24.12 | length 2375
  Top Signal w12: U13.44@5435.5,2562.05 5517.05,2562.05 5536,2581 5686,2581 5694.56,2572.44 5721.56,2572.44 v1(5725,2569)
  Top Signal w20: U24.12@7460,1962.44 v1(7460,2110)
  Bottom Signal w20: v1(5725,2569) 6184,2110 v1(7460,2110)
LC2_Con_AN+: D3.4 J8.4 R43.1 | length 1300.1
  Top Signal w20: R43.1@6355,1517.44 6356.97,1517.44 6400,1474.41 6400,1287.67 6336.74,1224.42 6289.15,1224.42 6238.87,1274.71 6178.58,1274.71 J8.4@6175.4,1277.88 6175.4,1169.6 6230,1115 6359.04,1115 6524.63,1280.59 D3.4@6753.47,1280.59
LC2_Con_AN-: D3.6 J8.5 R44.1 | length 1264.9
  Top Signal w20: R44.1@6130,1512.44 6131.97,1512.44 6159.41,1485 6202.69,1485 6245,1442.69 J8.5@6245,1347.48 6169.39,1347.48 6121.94,1300.03 6121.94,1153.06 6210,1065 6521.51,1065 6685.92,1229.41 D3.6@6753.47,1229.41
LC2_Con_VDD: C41.1 C42.2 J8.1 U26.1 U26.16 | length 807.3
  Top Signal w20: C42.2@6092.07,1912.46 C42.2@6089.61,1910 6109.02,1890.59 6140.11,1890.59 U26.16@6165,1915.47 ; C41.1@6092.07,1977.54 C41.1@6094.53,1980 ; U26.16@6165,1942.44 U26.16@6165,1915.47 ; J8.1@6175.4,1417.08 6142.48,1450 6100,1450 6060,1490 6060,1590 6165,1695 U26.1@6165,1747.56 U26.16@6165,1915.47
  Top Signal w30: C42.2@6092.07,1912.46 C41.1@6092.07,1977.54
LC2_DRDY: U13.43 U26.12 | length 1243.2
  Top Signal w12: U13.43@5435.5,2542.36 5662.36,2542.36 v1(5665,2545)
  Top Signal w20: U26.12@6365,1942.44 v1(6365,2025)
  Bottom Signal w20: v1(5665,2545) 5899.22,2310.78 5899.22,2305.78 6130,2075 6335,2075 6365,2045 v1(6365,2025)
LC_I2C_SCL: R19.2 SCL.1 U13.54 U24.13 U26.13 | length 3721.9
  Top Signal w12: U13.54@5435.5,2758.9 5506,2758.9 5506.47,2759.37 5521,2759.37 5533.18,2771.56 5556.56,2771.56 v1(5560,2775)
  Top Signal w20: R19.2@6279.57,2385 6279.78,2385.22 6279.78,2544.78 v1(6280,2545) ; v1(6280,2220) 6315,2185 U26.13@6315,1942.44 ; R19.2@6280,2385 6280,2345 6455,2170 7355,2170 ; U24.13@7410,1962.44 7410,2115 7355,2170 ; SCL.1@7855,1976 7835.47,1995.53 7781.47,1995.53 7607,2170 7355,2170
  Bottom Signal w12: v1(5560,2775) 6050,2775 v1(6280,2545) v1(6280,2220)